# Altium PCB Pcb - 副本-布线前.PcbDoc
Units mm, origin at the board's own origin, x right, y up, seen from the top; angles counter-clockwise.
Board outline 71.4 x 94.8 mm, 2 copper layers (Top Layer, Bottom Layer); 65 components, 54 nets, 246 pads, 0 vias.
Unrouted connection lines stored in the file: 169.
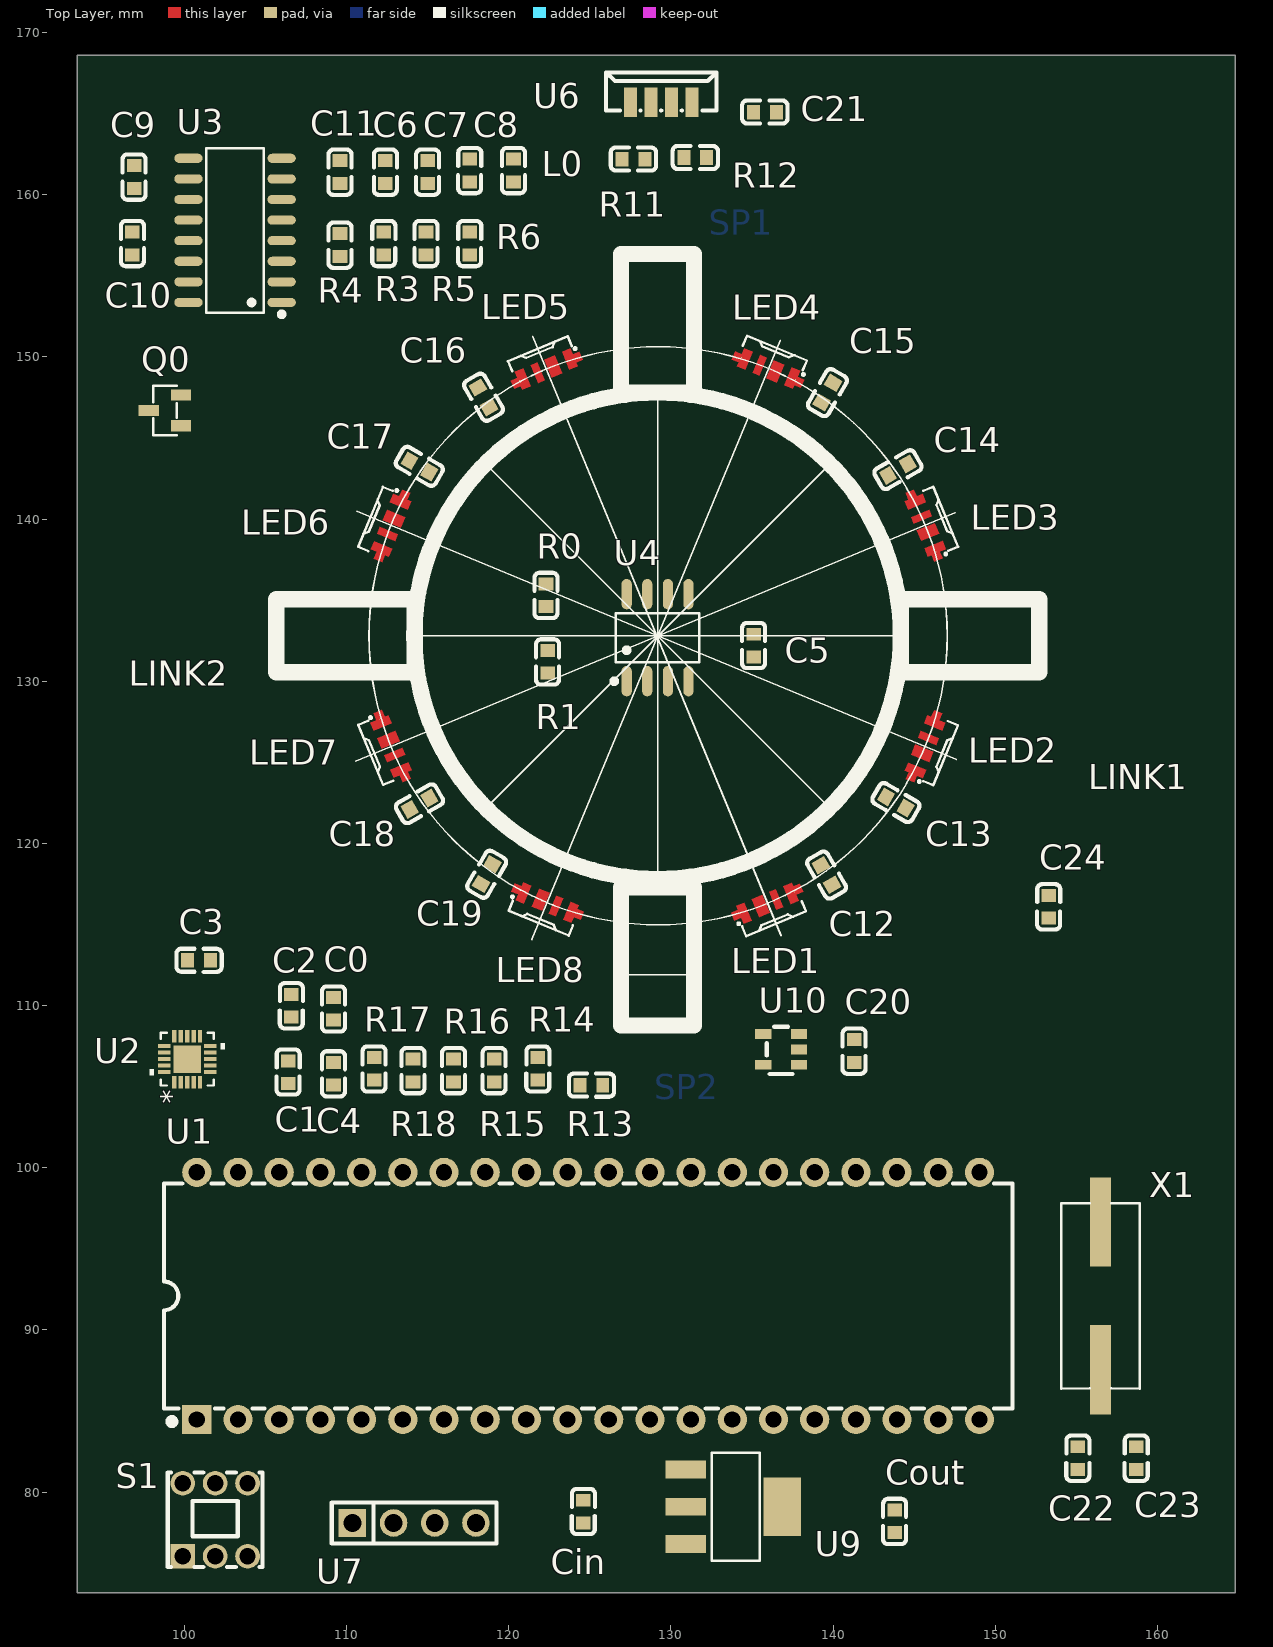
[diagram p0: Top Layer view]
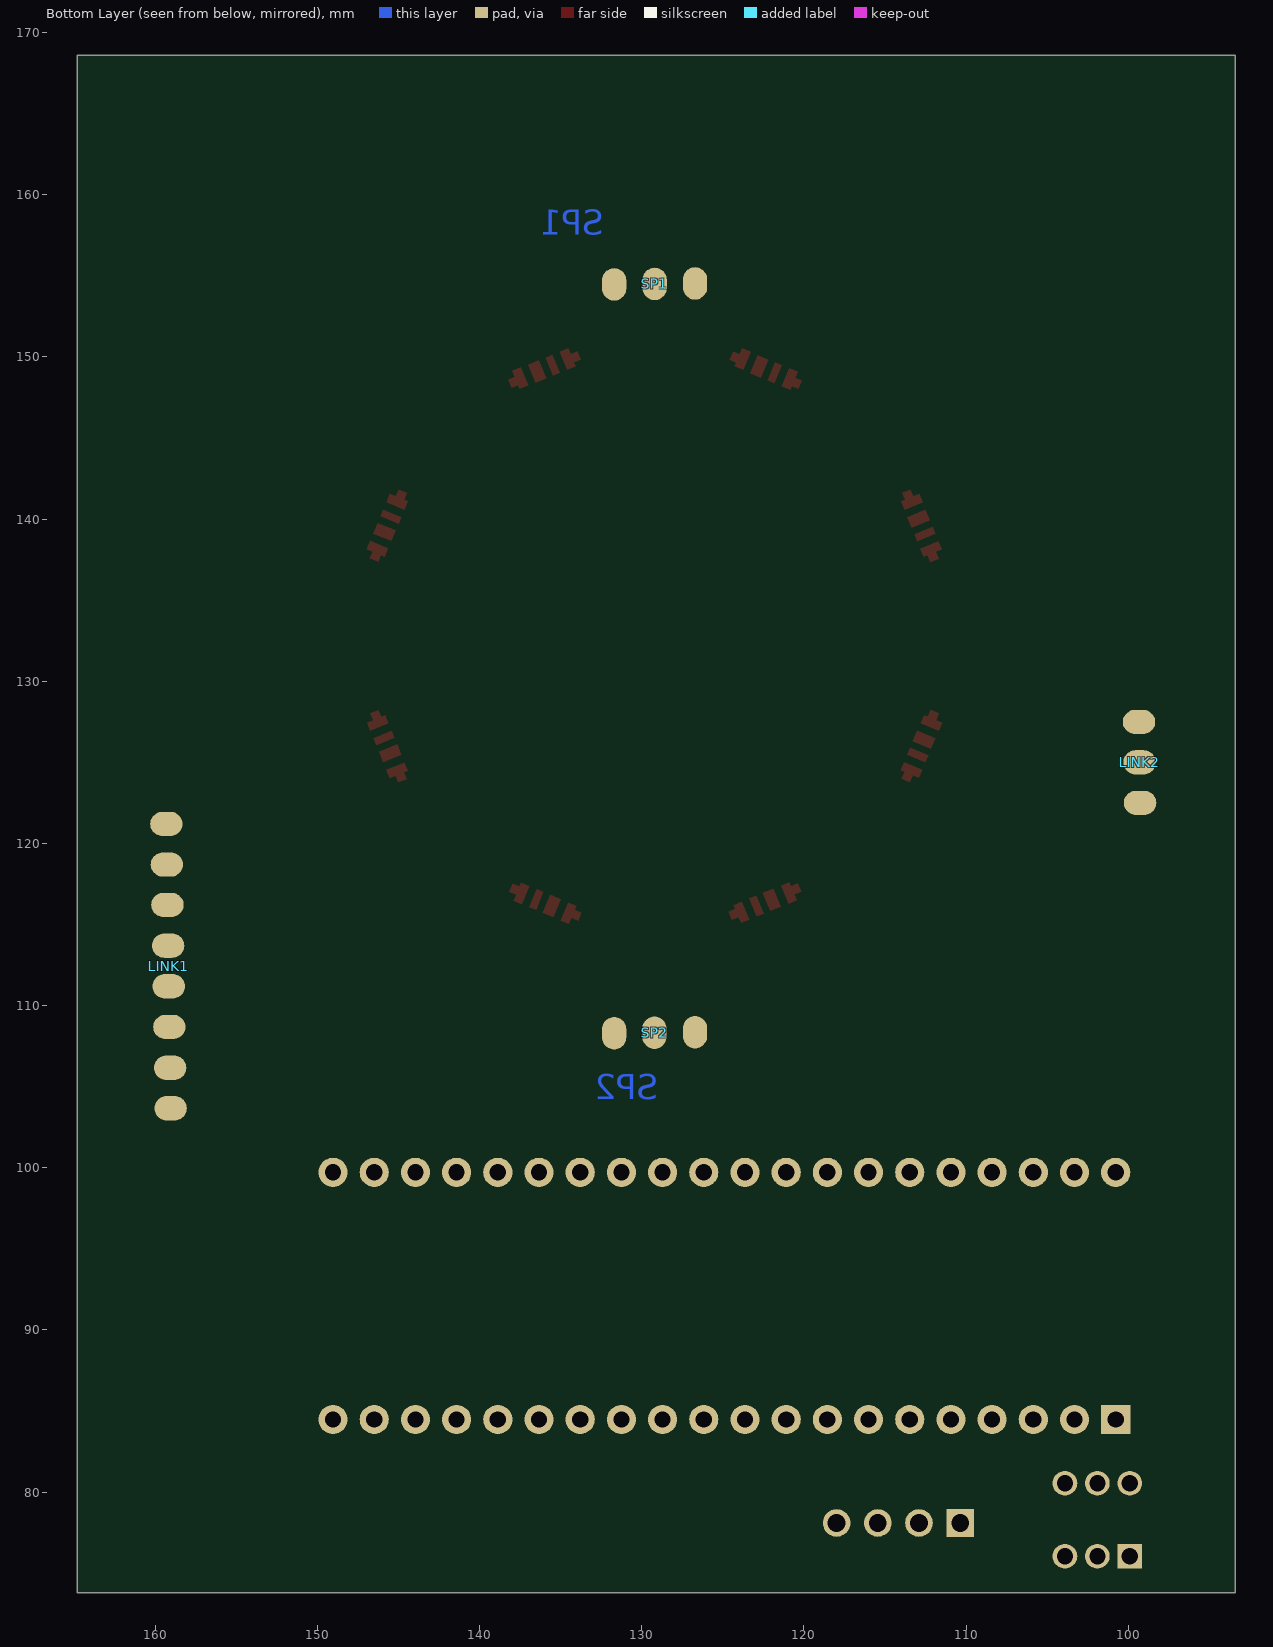
[diagram p1: Bottom Layer view, seen from below]

## Layer stack, top to bottom
Top Solder: solder mask 0.0102, Solder Resist, Dk 3.5
Top Layer: signal copper 0.0356
Dielectric 1: dielectric 0.32, FR-4, Dk 4.8
Bottom Layer: signal copper 0.0356
Bottom Solder: solder mask 0.0102, Solder Resist, Dk 3.5

## Board outline
93.4,73.8 93.4,168.6 164.8,168.6 164.8,73.8

## Design rules (kind name [scope] priority, off if disabled: settings)
Clearance [All] p1 off: gap=0.254 ignorepadtopadclearanceinfootprint=FALSE except(0: Arc-Hole Track-Hole SMDPad-Hole THPad-Hole Via-Hole Fill-Hole Poly-Hole Region-Hole Text-Hole)
PolygonConnect [All] p1: connectstyle=Relief reliefconductorwidth=0.254 reliefentries=4 polygonreliefangle="90 Angle" airgapwidth=0.254
RoutingVias [All] p1: holewidth=0.711 width=1.27 viastyle="Through Hole" minholewidth=0.711 minwidth=1.27 maxholewidth=0.711 maxwidth=1.27
SolderMaskExpansion [All] p1: expansion=0.102 istentingtop=FALSE
Width [All] p1: maxlimit=0.254 minlimit=0.254 preferedwidth=0.254
30 further rules are at their usual default settings.

## Components (designator, comment, footprint, x,y, rotation, side; value= is the part's Value field where it differs from the comment)
C0 "Capacitor 0.1 uF +/- 5% 16 V 0402" 0805贴片电容 109.2,109.8 r90 top value=100nF
C1 "Capacitor 0.1 uF +/- 5% 16 V 0402" 0805贴片电容 106.4,105.9 r270 top value=100nF
C2 "Capacitor 0.1 uF +/- 5% 16 V 0402" 0805贴片电容 106.6,110 r90 top value=100nF
C3 "Capacitor 0.1 uF +/- 5% 16 V 0402" 0805贴片电容 100.9,112.8 r180 top value=100nF
C4 "Capacitor 0.1 uF +/- 5% 16 V 0402" 0805贴片电容 109.2,105.8 r90 top value=100nF
C5 "Capacitor 0.1 uF +/- 5% 16 V 0402" 0805贴片电容 135.1,132.2 r270 top value=100nF
C6 "Capacitor 0.1 uF +/- 5% 16 V 0402" 0805贴片电容 112.4,161.4 r90 top value=100nF
C7 "Capacitor 0.1 uF +/- 5% 16 V 0402" 0805贴片电容 115,161.4 r90 top value=100nF
C8 "Capacitor 0.1 uF +/- 5% 16 V 0402" 0805贴片电容 117.6,161.5 r90 top value=100nF
C9 "Capacitor 0.1 uF +/- 5% 16 V 0402" 0805贴片电容 96.9,161.1 r90 top value=100nF
C10 "Capacitor 0.1 uF +/- 5% 16 V 0402" 0805贴片电容 96.8,157 r90 top value=10uF
C11 "Capacitor 0.1 uF +/- 5% 16 V 0402" 0805贴片电容 109.6,161.4 r90 top value=100nF
C12 "Capacitor 0.1 uF +/- 5% 16 V 0402" 0805贴片电容 139.6,118.056 r120 top value=100nF
C13 "Capacitor 0.1 uF +/- 5% 16 V 0402" 0805贴片电容 143.869,122.525 r150 top value=100nF
C14 "Capacitor 0.1 uF +/- 5% 16 V 0402" 0805贴片电容 143.994,143.05 r210 top value=100nF
C15 "Capacitor 0.1 uF +/- 5% 16 V 0402" 0805贴片电容 139.65,147.794 r240 top value=100nF
C16 "Capacitor 0.1 uF +/- 5% 16 V 0402" 0805贴片电容 118.45,147.506 r300 top value=100nF
C17 "Capacitor 0.1 uF +/- 5% 16 V 0402" 0805贴片电容 114.494,143.25 r330 top value=100nF
C18 "Capacitor 0.1 uF +/- 5% 16 V 0402" 0805贴片电容 114.506,122.45 r30 top value=100nF
C19 "Capacitor 0.1 uF +/- 5% 16 V 0402" 0805贴片电容 118.65,118.106 r60 top value=100nF
C20 "Capacitor 0.1 uF +/- 5% 16 V 0402" 0805贴片电容 141.3,107.2 r90 top value=100nF
C21 "Capacitor 0.1 uF +/- 5% 16 V 0402" 0805贴片电容 135.8,165.1 r0 top value=100nF
C22 "Capacitor 0.1 uF +/- 5% 16 V 0402" 0805贴片电容 155.1,82.1 r90 top value=20pF
C23 "Capacitor 0.1 uF +/- 5% 16 V 0402" 0805贴片电容 158.7,82.1 r90 top value=20pF
C24 "Capacitor 0.1 uF +/- 5% 16 V 0402" 0805贴片电容 153.3,116.1 r90 top value=100nF
Cin "Capacitor 0.1 uF +/- 5% 16 V 0402" 0805贴片电容 124.6,78.8 r270 top value=4.7uF
Cout "Capacitor 0.1 uF +/- 5% 16 V 0402" 0805贴片电容 143.8,78.2 r90 top value=4.7uF
L0 "LQM2HPN1R0MJ0L" 0805贴片电容 120.3,161.5 r90 top value=3.3µH
LED1 "SK6812SIDE-A" FZ-SK6812SIDE-A 135.965,116.311 r22.5 top
LED2 "SK6812SIDE-A" FZ-SK6812SIDE-A 145.682,125.966 r67.5 top
LED3 "SK6812SIDE-A" FZ-SK6812SIDE-A 145.687,139.625 r112.5 top
LED4 "SK6812SIDE-A" FZ-SK6812SIDE-A 136.022,149.285 r157.5 top
LED5 "SK6812SIDE-A" FZ-SK6812SIDE-A 122.322,149.249 r202.5 top
LED6 "SK6812SIDE-A" FZ-SK6812SIDE-A 112.74,139.616 r247.5 top
LED7 "SK6812SIDE-A" FZ-SK6812SIDE-A 112.748,125.982 r292.5 top
LED8 "SK6812SIDE-A" FZ-SK6812SIDE-A 122.379,116.346 r337.5 top
LINK1 "LINK" LINK 159.304,121.201 r270 top
LINK2 "LINK2" LINK2 99.269,122.5 r90 top
Q0 "MMBT4403" FZ-MMBT4403 98.8,146.7 r0 top
R0 "4D7KR2F" 0805贴片电容 122.3,135.3 r90 top value=4.7k
R1 "4D7KR2F" 0805贴片电容 122.4,131.2 r90 top value=4.7k
R3 "4D7KR2F" 0805贴片电容 112.3,157 r90 top value=100
R4 "4D7KR2F" 0805贴片电容 109.6,156.9 r90 top value=100
R5 "4D7KR2F" 0805贴片电容 114.9,157 r90 top value=8.2k
R6 "4D7KR2F" 0805贴片电容 117.6,157 r90 top value=10k
R11 "4D7KR2F" 0805贴片电容 127.7,162.2 r0 top value=2.2k
R12 "4D7KR2F" 0805贴片电容 131.5,162.3 r180 top value=2.2k
R13 "4D7KR2F" 0805贴片电容 125.1,105.1 r180 top value=10K
R14 "4D7KR2F" 0805贴片电容 121.8,106.1 r90 top value=10K
R15 "4D7KR2F" 0805贴片电容 119.1,106 r90 top value=10K
R16 "4D7KR2F" 0805贴片电容 116.6,106 r90 top value=10K (schematic designator 16)
R17 "4D7KR2F" 0805贴片电容 111.7,106.1 r90 top value=10K
R18 "4D7KR2F" 0805贴片电容 114.1,106 r90 top value=10K
S1 "5.8^2-Switch" FZ-Switch 101.9,78.3 r180 top
SP1 "StrainPiece1" LINK2 131.7,154.469 r180 top
SP2 "StrainPiece2" LINK2 126.709,108.363 r0 top
U1 "STC89C51-PDIP-40" 封装.STC89C51-PDIP-40 124.9,92.1 r0 top
U2 "TMC6300-3" 封装.TMC6300 100.178,106.7 r90 top
U3 "HX711" 封装.HX711 103.128,157.805 r90 top
U4 "MT6701" 封装.MT6701 129.182,132.687 r0 top
U6 "VEML7700" 封装.VEML7700 129.405,165.7 r0 top
U7 "USB" 2.54管脚 114.17,78.1 r0 top
U9 "AP2114HA-3.3" 封装.AP2114HA-3.3TRG1 133.9,79.1 r180 top
U10 "SN74LV1T34DBV" 封装.SN74LV1T34DBVR 136.8,107.3 r0 top
X1 "9C12000002" HC-49S_L11.4-W4.8 156.5,92.1 r90 top value=-

## Footprints (in the part's own frame and the unit in brackets; to place one, negate y for a bottom-side part, rotate by r counter-clockwise, add the part's x,y. Pads: shape width x height; smd on the part's side, far side on the other; paste and mask are expansions set on the pad)
2.54管脚 [mm]
  rect 1.7x1.7 hole 1.1: 1(-3.81,0)
  round 1.7 hole 1.1: 2(-1.27,0) 3(1.27,0) 4(3.81,0)
  silkscreen extent -5.08,-1.27 5.08,1.27
0805贴片电容 [mm]
  rect 0.8x0.9 smd: 1(-0.7,0) 2(0.7,0)
  silkscreen extent -1.41,-0.71 1.39,0.72
FZ-MMBT4403 [mm]
  rect 1.25x0.7 smd: 1(1,0.95) 2(1,-0.95) 3(-1,0)
  silkscreen extent -0.73,-1.53 0.73,1.53
FZ-SK6812SIDE-A [mil]
  round 1 smd: 1(-70.87,-0.49) 2(-17.72,0.49) 3(22.64,0.49) 4(70.86,0.49)
  Top Layer region: -31.5,24.12 -31.5,-23.13 -3.94,-23.13 -3.94,24.12 -31.5,24.12
  Top Layer region: -51.18,23.13 -51.18,-24.11 -72.84,-24.11 -72.84,-8.36 -90.55,-8.36 -90.55,13.29 -72.84,13.29 -72.84,23.13 -51.18,23.13
  Top Layer region: 13.78,-23.13 31.49,-23.13 31.49,24.11 13.78,24.11 13.78,-23.13
  Top Layer region: 51.18,24.11 51.18,-23.13 72.83,-23.13 72.83,-7.38 90.55,-7.38 90.55,14.27 72.83,14.27 72.83,24.11 51.18,24.11
  silkscreen extent -87,-54 79,-16
FZ-Switch [mil]
  rect 60x60 hole 39.37: 1(78.74,88.59)
  round 60 hole 39.37: 2(0,88.59) 3(-78.74,88.59) 4(-78.74,-88.59) 5(0,-88.59) 6(78.74,-88.59)
  silkscreen extent -115,-115 115,115
HC-49S_L11.4-W4.8 [mm]
  rect 5.5x1.3 smd: 1(-4.553,0) 2(4.553,0)
  silkscreen extent -5.72,-2.41 5.71,2.41
LINK [mm]
  oval 1.5x2 smd far side: 1(0,0) 2(2.5,-0.031) 3(4.991,-0.063) 4(7.501,-0.104) 5(10.008,-0.145) 6(12.516,-0.181) 7(15.034,-0.228) 8(17.531,-0.256)
LINK2 [mm]
  oval 1.5x2 smd far side: 1(0,0) 2(2.5,-0.031) 3(4.991,-0.063)
封装.AP2114HA-3.3TRG1 [mm]
  rect 2.5x1.1 smd: 1(2.97,-2.3) 2(2.97,0) 3(2.97,2.3)
  rect 2.34x3.6 smd: 4(-2.97,0)
  silkscreen extent -1.57,-3.33 1.37,3.33
封装.HX711 [mm]
  oval 0.56x1.745 smd: 1(-4.445,-2.872) 2(-3.175,-2.872) 3(-1.905,-2.872) 4(-0.635,-2.872) 5(0.635,-2.872) 6(1.905,-2.872) 7(3.175,-2.872) 8(4.445,-2.872) 9(4.445,2.872) 10(3.175,2.872) 11(1.905,2.872) 12(0.635,2.872) 13(-0.635,2.872) 14(-1.905,2.872) 15(-3.175,2.872) 16(-4.445,2.872)
  silkscreen extent -5.33,-3.02 5.08,1.77
封装.MT6701 [mm]
  oval 0.63x1.865 smd: 1(-1.905,-2.682) 2(-0.635,-2.682) 3(0.635,-2.682) 4(1.905,-2.682) 5(1.905,2.683) 6(0.635,2.683) 7(-0.635,2.683) 8(-1.905,2.683)
  silkscreen extent -2.82,-2.83 2.58,1.52
封装.SN74LV1T34DBVR [mm]
  rect 1x0.6 smd paste+0 mask+0.05: 1(1.1,-0.95) 2(1.1,0) 3(1.1,0.95) 4(-1.1,0.95) 5(-1.1,-0.95)
  silkscreen extent -0.89,-1.52 0.7,1.4
封装.STC89C51-PDIP-40 [mm]
  rect 1.8x1.8 hole 1: 1(-24.13,-7.62)
  round 1.8 hole 1: 2(-21.59,-7.62) 3(-19.05,-7.62) 4(-16.51,-7.62) 5(-13.97,-7.62) 6(-11.43,-7.62) 7(-8.89,-7.62) 8(-6.35,-7.62) 9(-3.81,-7.62) 10(-1.27,-7.62) 11(1.27,-7.62) 12(3.81,-7.62) 13(6.35,-7.62) 14(8.89,-7.62) 15(11.43,-7.62) 16(13.97,-7.62) 17(16.51,-7.62) 18(19.05,-7.62) 19(21.59,-7.62) 20(24.13,-7.62) 21(24.13,7.62) 22(21.59,7.62) 23(19.05,7.62) 24(16.51,7.62) 25(13.97,7.62) 26(11.43,7.62) 27(8.89,7.62) 28(6.35,7.62) 29(3.81,7.62) 30(1.27,7.62) 31(-1.27,7.62) 32(-3.81,7.62) 33(-6.35,7.62) 34(-8.89,7.62) 35(-11.43,7.62) 36(-13.97,7.62) 37(-16.51,7.62) 38(-19.05,7.62) 39(-21.59,7.62) 40(-24.13,7.62)
  silkscreen extent -26.16,-7.95 26.16,6.93
封装.TMC6300 [mil]
  rect 30x10 smd paste+0 mask+0: 1(-56,31.5) 2(-56,15.75) 3(-56,0) 4(-56,-15.75) 5(-56,-31.5) 11(56,-31.5) 12(56,-15.75) 13(56,0) 14(56,15.75) 15(56,31.5)
  rect 10x30 smd paste+0 mask+0: 6(-31.5,-56) 7(-15.75,-56) 8(0,-56) 9(15.75,-56) 10(31.5,-56) 16(31.5,56) 17(15.75,56) 18(0,56) 19(-15.75,56) 20(-31.5,56)
  rect 67x67 smd paste+0 mask+0: 21(0,0)
  silkscreen extent -64,-91 64,91
封装.VEML7700 [mm]
  rect 0.8x1.8 smd paste+0 mask+0.05: 1(1.905,0) 2(0.635,0) 3(-0.635,0) 4(-1.905,0)
  silkscreen extent -3.4,-0.5 3.4,1.85

## Part data
C0 C1 C2 C3 C4 C5 C6 C7 C8 C9 C10 C11 C12 C13 C14 C15 C16 C17 C18 C19 C20 C21 C22 C23 C24 Cin Cout: library part CAP-NP-2, "Chip Capacitor, 0.1 uF, +/- 5%, 16 V, 0402 (1005 Metric)", Capacitor Type=Ceramic, Case/Package=0402, Max Operating Temperature=125°C, Min Operating Temperature=-55°C, Tolerance=5%, Voltage Rating=16V, Mounting Technology=SM, Pins=2, RoHS Compliant=True
L0: library part CMP-006-00008-6, "Chip Inductor, 1 uH, +/- 20%, 1 MHz, -55 to 125 degC, 1008 (2520 Metric), RoHS, Tape and Reel", Case/Package=1008, Current Rating=1.5A, Manufacturer=Murata, Max Operating Temperature=85°C, Min Operating Temperature=-40°C, Package Description="2-Pin Surface Mount Device, Body 2.5 x 2 mm", Package Quantity=3000, Resistance=0.09Ohm, Self Resonant Frequency=70MHz, Tolerance=20%, Core Material=Ferrite, Datasheet URL=http://psearch.en.murata.com/inductor/product/LQM2HPN1R0MJ0%23.pdf, Datasheet Version=Aug-16, Mounting Technology=SM, Package Reference=1008, Packaging=TapeandReel, RoHS Compliant=True, Shielding=Shielded
LED1 LED2 LED3 LED4 LED5 LED6 LED7 LED8: library part CMP-007-000137-1, Design Item ID=SK6812SIDE-A, Source=IC.SchLib
LINK1: library part CMP-014-000001-1, Design Item ID=LINK, Source=Board.SchLib
LINK2: library part CMP-014-000018-1, Design Item ID=LINK2, Source=Board.SchLib
Q0: library part CMP-013-00004-3, Case/Package=TO-92-3, Manufacturer=Unisonic, Package Description="3-Pin Through Hole Device, Dia 4.58 mm, Pitch 1.27 mm", Datasheet URL=http://media.nkcelectronics.com/datasheet/s8550.pdf, Datasheet Version="Rev. E, 06/2014", Mounting Technology=TH, Package Reference=TO-92-3, RoHS Compliant=Unknown
R0 R1 R3 R4 R5 R6 R12 R13 R14 R15 R16 R17 R18: library part CMP-009-00105-2, "4K7 0.063W 1% 0402 (1005 Metric)  SMD", Case/Package=0402, Power=63mW, Tolerance=1%, Mounting Technology=SMT, Pins=2
R11: library part CMP-009-00105-2, Case/Package=0402, Power=63mW, Tolerance=1%, Mounting Technology=SMT, Pins=2
S1: library part CMP-011-00013-1, Design Item ID=5.8^2-Switch, Designer=U?, Device="5.8 ZSPT", Source=IC.SchLib, Symbol="5.8 ZSPT"
SP1: library part CMP-014-000027-1, Design Item ID=StrainPiece1, Source=Board.SchLib
SP2: library part CMP-014-000028-1, Design Item ID=StrainPiece2, Source=Board.SchLib
U1: library part CMP-007-000098-1, "主控MCU", Design Item ID=STC89C51-PDIP-40, Source=IC.SchLib
U2: library part CMP-007-000236-1, Design Item ID=TMC6300-3, Source=IC.SchLib
U3: library part CMP-007-000093-1, "压力模数转换器", Design Item ID=HX711, Source=IC.SchLib
U4: library part CMP-007-000116-1, "霍尔传感器", Design Item ID=MT6701, Source=IC.SchLib
U6: library part CMP-007-000095-1, "感光想读传感器", Design Item ID=VEML7700, Source=IC.SchLib
U7: library part CMP-007-000053-1, Design Item ID=USB, Source=IC.SchLib
U9: library part CMP-007-000082-1, "电压控制器", Design Item ID=AP2114HA-3.3, Source=IC.SchLib
U10: library part CMP-007-000097-1, "电流放大器", Design Item ID=SN74LV1T34DBV, Source=IC.SchLib
X1: library part CMP-007-000156-1, JLCPCB Part Class="Extended Part", LCSC Part Name="SMD HC-49S 12M 49SMD 20pF 20ppm 30R 0~70℃", Load Capacitance=-, Manufacturer=TXC(晶技), Add into BOM=yes, Convert to PCB=yes, Crystal Type=-, Datasheet=https://atta.szlcsc.com/upload/public/pdf/source/20161217/1481939208787.pdf, Design Item ID=9C12000002, Device=9C12000002, Manufacturer Part=9C12000002, Operating Temperature=-, Source=IC.SchLib, Supplier Footprint=HC-49S-SMD, Supplier Part=C90939, Symbol=9C1202LCSC-DDK2S

## Nets (pads, with @x,y where several pads share a name; then routed paths per layer and width w, separated by ;. In a path a pad name is that pad's centre, name@x,y a point inside that pad or via, vN(x,y) a via of type N, cw(c..) or ccw(c..) an arc to the next point about the centre after c; other vN are vias at no path point)
+3.3V: C1.1 C2.1 C3.1 C5.1 C9.1 C10.1 C21.1 Cout.1 Q0.1 R0.2 R1.2 R11.2 R12.2 S1.5 U2.18 U3.1 U3.15 U3.16 U4.1 U4.2 U6.2
+5: C4.1 C12.1 C13.1 C14.1 C15.1 C16.1 C17.1 C18.1 C19.1 LED1.2 LED2.2 LED3.2 LED4.2 LED5.2 LED6.2 LED7.2 LED8.2 U2.11
+5V: C20.1 Cin.1 U1.40 U10.5
LCD_BACKLIGHT: LINK1.6 U1.6
LCD_CMD: LINK1.8 U1.8
LCD_CS: LINK1.7 U1.7
LCD_DATA: LINK1.5 U1.5
LCD_RST: LINK1.3 U1.3
LCD_SCK: LINK1.4 U1.4
LED_DATA_3V3: U1.26 U10.2
LED_DATA_5V: LED1.1 U10.4
MAG_CLK: R1.1 U1.21 U4.7
MAG_CSN: U1.22 U4.6
MAG_DO: R0.1 U1.23 U4.8
NetC0_2: C0.2 U2.13
NetC1_2: C1.2 U2.2
NetC6_1: C6.1 R4.1 U3.7
NetC6_2: C6.2 R3.1 U3.8
NetC11_2: C11.2 U3.6
NetC22_2: C22.2 C23.2 U1.18 U1.19 X1.1 X1.2
NetL0_2: L0.2 Q0.3 R6.1 U3.3
NetLED1_3: LED1.3 LED2.1
NetLED2_3: LED2.3 LED3.1
NetLED3_3: LED3.3 LED4.1
NetLED4_3: LED4.3 LED5.1
NetLED5_3: LED5.3 LED6.1
NetLED6_3: LED6.3 LED7.1
NetLED7_3: LED7.3 LED8.1
NetQ0_2: Q0.2 U3.2
NetR5_1: R5.1 R6.2 U3.4
NetS1_4: S1.4 U7.1
NetU9_1: U9.1
NetU9_2: U9.2
SCL: R12.1 U1.17 U6.1
SDA: R11.1 U1.16 U6.4
STRAIN_DO: U1.24 U3.12
STRAIN_E+: C7.1 C8.1 L0.1 SP1.1 SP2.1
STRAIN_E-: C0.1 C2.2 C3.2 C4.2 C5.2 C7.2 C8.2 C9.2 C10.2 C11.1 C12.2 C13.2 C14.2 C15.2 C16.2 C17.2 C18.2 C19.2 C20.2 C21.2 C22.1 C23.1 C24.1 Cin.2 Cout.2 LED1.4 LED2.4 LED3.4 LED4.4 LED5.4 LED6.4 LED7.4 LED8.4 LINK1.2 R5.2 R13.1 R14.1 R15.1 R16.1 R17.1 R18.1 SP1.3 SP2.3 U1.20 U2.8 U2.9 U2.14 U2.16 U2.20 U2.21 U3.5 U3.9 U3.10 U3.14 U4.4 U6.3 U7.4 U9.3 U9.4 U10.3
STRAIN_S+: R3.2 SP1.2 SP2.2
STRAIN_S-: R4.2
STRAIN_SCK: U1.25 U3.11
TMC_DIAG: U1.33 U2.12
TMC_UH: R13.2 U1.39 U2.3
TMC_UL: R16.2 U1.36 U2.6
TMC_VH: R14.2 U1.38 U2.4
TMC_VL: R18.2 U1.34 U2.10
TMC_WH: R15.2 U1.37 U2.5
TMC_WL: R17.2 U1.35 U2.7
U: LINK2.1 U2.15
USB-RX: U1.11 U7.3
USB-TX: U1.10 U7.2
V: LINK2.2 U2.17
VCC: C24.2 LINK1.1
W: LINK2.3 U2.1
pads on no net: LED8.3 S1.1 S1.2 S1.3 S1.6 U1.1 U1.2 U1.9 U1.12 U1.13 U1.14 U1.15 U1.27 U1.28 U1.29 U1.30 U1.31 U1.32 U2.19 U3.13 U4.3 U4.5 U10.1

## Silkscreen, mask and mechanical layers (free items; w line width, h text height)
Top Overlay:
  circle w0.1: c129.215,132.81 r17.826
  circle w1: c129.182,132.81 r15
  lines w0.1: 110.563,125.076 147.518,140.384 ; 110.64,140.486 147.595,125.179 ; 114.212,132.81 144.182,132.81 ; 118.566,143.412 139.779,122.199 ; 118.609,122.203 139.822,143.416 ; 121.435,114.069 136.742,151.024 ; 121.484,151.272 136.791,114.317 ; 126.932,111.908 129.182,111.908 131.432,111.908 ; 129.182,117.81 129.182,147.81 ; 131.432,108.768 129.182,108.768 126.932,108.768 126.932,117.306 129.182,117.306 131.432,117.306
  lines w1: 105.674,130.56 105.674,135.06 114.212,135.06 114.212,130.56 105.674,130.56 ; 126.932,108.768 131.432,108.768 131.432,117.306 126.932,117.306 126.932,108.768 ; 126.932,147.81 131.432,147.81 131.432,156.348 126.932,156.348 126.932,147.81 ; 144.182,130.56 144.182,135.06 152.72,135.06 152.72,130.56 144.182,130.56
Mechanical 13:
  the board outline again, w0.254

## Text inside footprints (layer, text, board x,y; h text height)
U2: Top Overlay "*" at 99.813,103.944 h1.27 r90; Mechanical 13 "*" at 99.813,105.341 h1.27 r90